# EAGLE board CT_schematic (EAGLE 7.6.0)

Size 100 x 80 mm. Coordinates in mm from the lower left corner, seen from the top.
Outline: 0,0 100,0 100,80 0,80 0,0
Copper layers (1*16): Top 0.035mm / dielectric 1.5mm / Bottom 0.035mm
Design rules "default": minimum track width 10mil, minimum drill 24mil, track to track 8mil, track to pad 8mil, pad to pad 8mil, via to via 8mil, smd to smd 8mil, copper to edge 40mil, drill to drill 8mil, minimum pad ring 10mil, minimum via ring 8mil, stop-mask expansion 4mil, vias tented up to drill 0mil, thermal gap 10mil

## Footprints (pad centres in the part's own frame; a part is rotated, then mirrored left to right if it is on the bottom)
C0603 = smd 0.8 x 0.8: 1 -0.762,0; 2 0.762,0
C0402 = smd 0.5 x 0.5: 1 -0.508,0; 2 0.508,0
C1206 = smd 1.3 x 1.6: 1 -1.524,0; 2 1.524,0
C1210 = smd 1.2 x 2.5: 1 -1.524,0; 2 1.524,0
EXV-9H = smd 3.505 x 1.676: 1 -2.857,0; 2 2.857,0
L0603 = smd 0.8 x 0.8: 1 -0.762,0; 2 0.762,0
PJ-037B_PACKAGE = drill 3.7 square: 1 12,0 | drill 3.2 square: 2 6,0
R0603 = smd 0.8 x 0.8: 1 -0.762,0; 2 0.762,0
VFQFPN36 = smd 1.067 x 0.305: 1 -2.832,2; 2 -2.832,1.5; 3 -2.832,1; 4 -2.832,0.5; 5 -2.832,0; 6 -2.832,-0.5; 7 -2.832,-1; 8 -2.832,-1.5; 9 -2.832,-2; 19 2.832,-2; 20 2.832,-1.5; 21 2.832,-1; 22 2.832,-0.5; 23 2.832,0; 24 2.832,0.5; 25 2.832,1; 26 2.832,1.5; 27 2.832,2 | smd 0.305 x 1.067: 10 -2,-2.832; 11 -1.5,-2.832; 12 -1,-2.832; 13 -0.5,-2.832; 14 0,-2.832; 15 0.5,-2.832; 16 1,-2.832; 17 1.5,-2.832; 18 2,-2.832; 28 2,2.832; 29 1.5,2.832; 30 1,2.832; 31 0.5,2.832; 32 0,2.832; 33 -0.5,2.832; 34 -1,2.832; 35 -1.5,2.832; 36 -2,2.832 | smd 4.242 x 4.242: 37 0,0
SOIC-8 = smd 1.6 x 0.6: 1 -2.7,1.905 | smd 1.55 x 0.6: 2 -2.7,0.635; 3 -2.7,-0.635; 4 -2.7,-1.905; 5 2.7,-1.905; 6 2.7,-0.635; 7 2.7,0.635; 8 2.7,1.905
DFN8-S = smd 0.6 x 0.4: 1 -2.69,1.905; 2 -2.69,0.635; 3 -2.69,-0.635; 4 -2.69,-1.905; 5 2.69,-1.905; 6 2.69,-0.635; 7 2.69,0.635; 8 2.69,1.905
ASFL1 = smd 1.7 x 1.5: 1 -1.27,-1.1; 2 1.27,-1.1; 3 1.27,1.1; 4 -1.27,1.1
WSON-8 = smd 0.3 x 0.6: 1 -0.75,0; 2 0.05,0; 3 0.85,0; 4 1.65,0; 5 1.65,3.8; 6 0.85,3.8; 7 0.05,3.8; 8 -0.75,3.8 | smd 3 x 2.6: PAD 0.45,1.9
SON-6 = smd 0.55 x 0.3: 1 -0.355,0.5 | smd 0.52 x 0.3: 2 -0.37,0; 3 -0.37,-0.5; 4 0.37,-0.5; 5 0.37,0; 6 0.37,0.5
SW_4-1437565-2 = smd 1.4 x 2.1: 1 -2.23,4.55; 2 -2.23,-4.55; 3 2.23,4.55; 4 2.23,-4.55
LGM67K-G1J2-24-Z = smd 0.8 x 1.4: A -2,0; C 0,0
NC7SZ125M5X = smd 1.3 x 0.7: 1 -1.3,0.95; 2 -1.3,0; 3 -1.3,-0.95; 4 1.3,-0.95; 5 1.3,0.95

## Placement (x,y rotation side)
C1  1e-07  [C0603]  -43.18,52.07 0 top  (outside the outline)
C2  1e-07  [C0603]  -46.99,52.07 0 top  (outside the outline)
C3  1e-07  [C0603]  -50.8,52.07 0 top  (outside the outline)
C4  4.7e-06  [C0603]  -39.37,52.07 0 top  (outside the outline)
C5  1e-07  [C0603]  -54.61,52.07 0 top  (outside the outline)
C6  1e-07  [C0603]  -58.42,52.07 0 top  (outside the outline)
C7  1e-08  [C0603]  -15.24,57.15 0 top  (outside the outline)
C8  1e-08  [C0603]  -19.05,57.15 0 top  (outside the outline)
C9  1e-06  [C0603]  -22.86,57.15 0 top  (outside the outline)
C10  1e-08  [C0402]  -15.24,62.23 0 top  (outside the outline)
C11  1e-08  [C0402]  -19.05,62.23 0 top  (outside the outline)
C12  1e-08  [C0402]  -22.86,62.23 0 top  (outside the outline)
C13  1e-08  [C0402]  -26.67,62.23 0 top  (outside the outline)
C14  1e-05  [C1206]  -57.15,38.1 0 top  (outside the outline)
C15  1e-05  [C1210]  -50.8,38.1 0 top  (outside the outline)
C16  1e-07  [C0402]  -30.48,62.23 0 top  (outside the outline)
C17  0.0001  [EXV-9H]  -17.78,39.37 0 top  (outside the outline)
C18  0.0001  [EXV-9H]  -29.21,39.37 0 top  (outside the outline)
C19  1e-08  [C0402]  -34.29,62.23 0 top  (outside the outline)
F1  240.0  [L0603]  -26.67,57.15 0 top  (outside the outline)
J1  PJ-037B  [PJ-037B_PACKAGE]  -27.94,7.62 0 top  (outside the outline)
R1  10000.0  [R0603]  -36.83,45.72 0 top  (outside the outline)
R2  1000.0  [R0603]  -30.48,57.15 0 top  (outside the outline)
R3  1600.5  [R0603]  -34.29,57.15 0 top  (outside the outline)
R4  4700.0  [R0603]  -38.1,57.15 0 top  (outside the outline)
R5  2200.0  [R0603]  -41.91,57.15 0 top  (outside the outline)
R6  2200.0  [R0603]  -45.72,57.15 0 top  (outside the outline)
R7  10000.0  [R0603]  -41.91,45.72 0 top  (outside the outline)
R8  10000.0  [R0603]  -46.99,45.72 0 top  (outside the outline)
R9  10000.0  [R0603]  -52.07,45.72 0 top  (outside the outline)
R10  10000.0  [R0603]  -57.15,45.72 0 top  (outside the outline)
R11  10000.0  [R0603]  -15.24,52.07 0 top  (outside the outline)
R12  10000.0  [R0603]  -20.32,52.07 0 top  (outside the outline)
R13  10000.0  [R0603]  -25.4,52.07 0 top  (outside the outline)
R14  100000.0  [R0603]  -21.59,45.72 0 top  (outside the outline)
R15  2231.0  [R0603]  -49.53,57.15 0 top  (outside the outline)
R16  1000.0  [R0603]  -53.34,57.15 0 top  (outside the outline)
R17  10000.0  [R0603]  -30.48,52.07 0 top  (outside the outline)
R18  10000.0  [R0603]  -35.56,52.07 0 top  (outside the outline)
R19  9100.0  [R0603]  -57.15,57.15 0 top  (outside the outline)
R20  680000.0  [R0603]  -26.67,45.72 0 top  (outside the outline)
R21  120000.0  [R0603]  -31.75,45.72 0 top  (outside the outline)
U1  STM32F101T4U6  [VFQFPN36]  -54.61,29.21 0 top  (outside the outline)
U2  AT25640B-SSHL-T  [SOIC-8]  -38.1,19.05 0 top  (outside the outline)
U3  24AA256-I/MF  [DFN8-S]  -22.86,20.32 0 top  (outside the outline)
U4  ASFL1-25MHZ-NCS  [ASFL1]  -46.99,30.48 0 top  (outside the outline)
U5  LP3878SDX-ADJ/NOPB  [WSON-8]  -30.48,27.94 0 top  (outside the outline)
U6  TPS3895ADRYR  [SON-6]  -36.83,60.96 0 top  (outside the outline)
U7  4-1437565-2  [SW_4-1437565-2]  -44.45,6.35 0 top  (outside the outline)
U8  Q65110A2395  [LGM67K-G1J2-24-Z]  -39.37,38.1 0 top  (outside the outline)
U9  nc7sz125m5x  [NC7SZ125M5X]  -15.24,45.72 0 top  (outside the outline)

## Library data of the parts
C1-C19 F1 J1 R1-R21 U1-U9 = circuit_tree

## Nets
CLK_U1_2: U1.2 U4.3
GND: C1.2 C2.2 C3.2 C4.2 C5.2 C6.2 C7.2 C8.2 C9.2 C10.2 C11.2 C12.2 C13.2 C14.2 C15.2 C16.2 C17.2 C18.2 C19.2 J1.2 R2.2 R7.2 R12.2 R13.2 R16.2 R19.2 R21.2 U1.5 U1.18 U1.26 U1.36 U1.37 U2.4 U3.4 U4.2 U5.3 U5.PAD U6.2 U8.C U9.1 U9.3
NET_U1_4: R4.1 U1.4 U9.4
NET_U1_6: C7.1 C8.1 C9.1 F1.1 U1.6
NET_U1_31: R3.1 U1.31 U8.A
NET_U1_32: R1.1 U1.32 U7.3 U7.4
NET_U1_33: R5.1 U1.33 U3.6
NET_U1_34: R6.1 U1.34 U3.5
NET_U1_35: R7.1 U1.35
NET_U2_3: R8.1 U2.3
NET_U2_7: R10.1 U2.7
NET_U3_1: R11.1 U3.1
NET_U3_2: R12.1 U3.2
NET_U3_3: R13.1 U3.3
NET_U5_1: C13.1 U5.1
NET_U5_6: R15.2 R16.1 U5.6
NET_U5_8: R14.1 U5.8
NET_U6_1: R18.1 R19.1 U6.1
NET_U6_3: R20.2 R21.1 U6.3
NET_U6_4: R17.1 U6.4 U9.2
NET_U7_1: R2.1 U7.1 U7.2
PROC_SPI1_MISO: U1.13 U2.2
PROC_SPI1_MOSI: U1.14 U2.5
PROC_SPI1_NSS: R9.1 U1.11 U2.1
PROC_SPI1_SCK: U1.12 U2.6
VCC_S1_6V4: C14.1 C17.1 C18.1 J1.1 R14.2 U5.4
VCC_TIER1_3V3: C1.1 C2.1 C3.1 C4.1 C5.1 C6.1 C10.1 C11.1 C12.1 C15.1 C16.1 C19.1 F1.2 R1.2 R3.2 R4.2 R5.2 R6.2 R8.2 R9.2 R10.2 R11.2 R15.1 R17.2 R18.2 R20.1 U1.1 U1.19 U1.27 U2.8 U3.7 U3.8 U4.4 U5.5 U6.6 U9.5

## Tracks (layer width: path | path; a pad name or v marks a point on that pad's centre or on a via)
CLK_U1_2  (1 unrouted)
GND  (40 unrouted)
NET_U1_4  (2 unrouted)
NET_U1_6  (4 unrouted)
NET_U1_31  (2 unrouted)
NET_U1_32  (3 unrouted)
NET_U1_33  (2 unrouted)
NET_U1_34  (2 unrouted)
NET_U1_35  (1 unrouted)
NET_U2_3  (1 unrouted)
NET_U2_7  (1 unrouted)
NET_U3_1  (1 unrouted)
NET_U3_2  (1 unrouted)
NET_U3_3  (1 unrouted)
NET_U5_1  (1 unrouted)
NET_U5_6  (2 unrouted)
NET_U5_8  (1 unrouted)
NET_U6_1  (2 unrouted)
NET_U6_3  (2 unrouted)
NET_U6_4  (2 unrouted)
NET_U7_1  (2 unrouted)
PROC_SPI1_MISO  (1 unrouted)
PROC_SPI1_MOSI  (1 unrouted)
PROC_SPI1_NSS  (2 unrouted)
PROC_SPI1_SCK  (1 unrouted)
VCC_S1_6V4  (5 unrouted)
VCC_TIER1_3V3  (35 unrouted)